# Altium PCB PCB1.PcbDoc
Units mm, origin at the board's own origin, x right, y up, seen from the top; angles counter-clockwise.
Board outline 51 x 58.5 mm, 2 copper layers (Top Layer, Bottom Layer), stack 0.452 mm thick; 7 components, 8 nets, 61 pads, 0 vias.
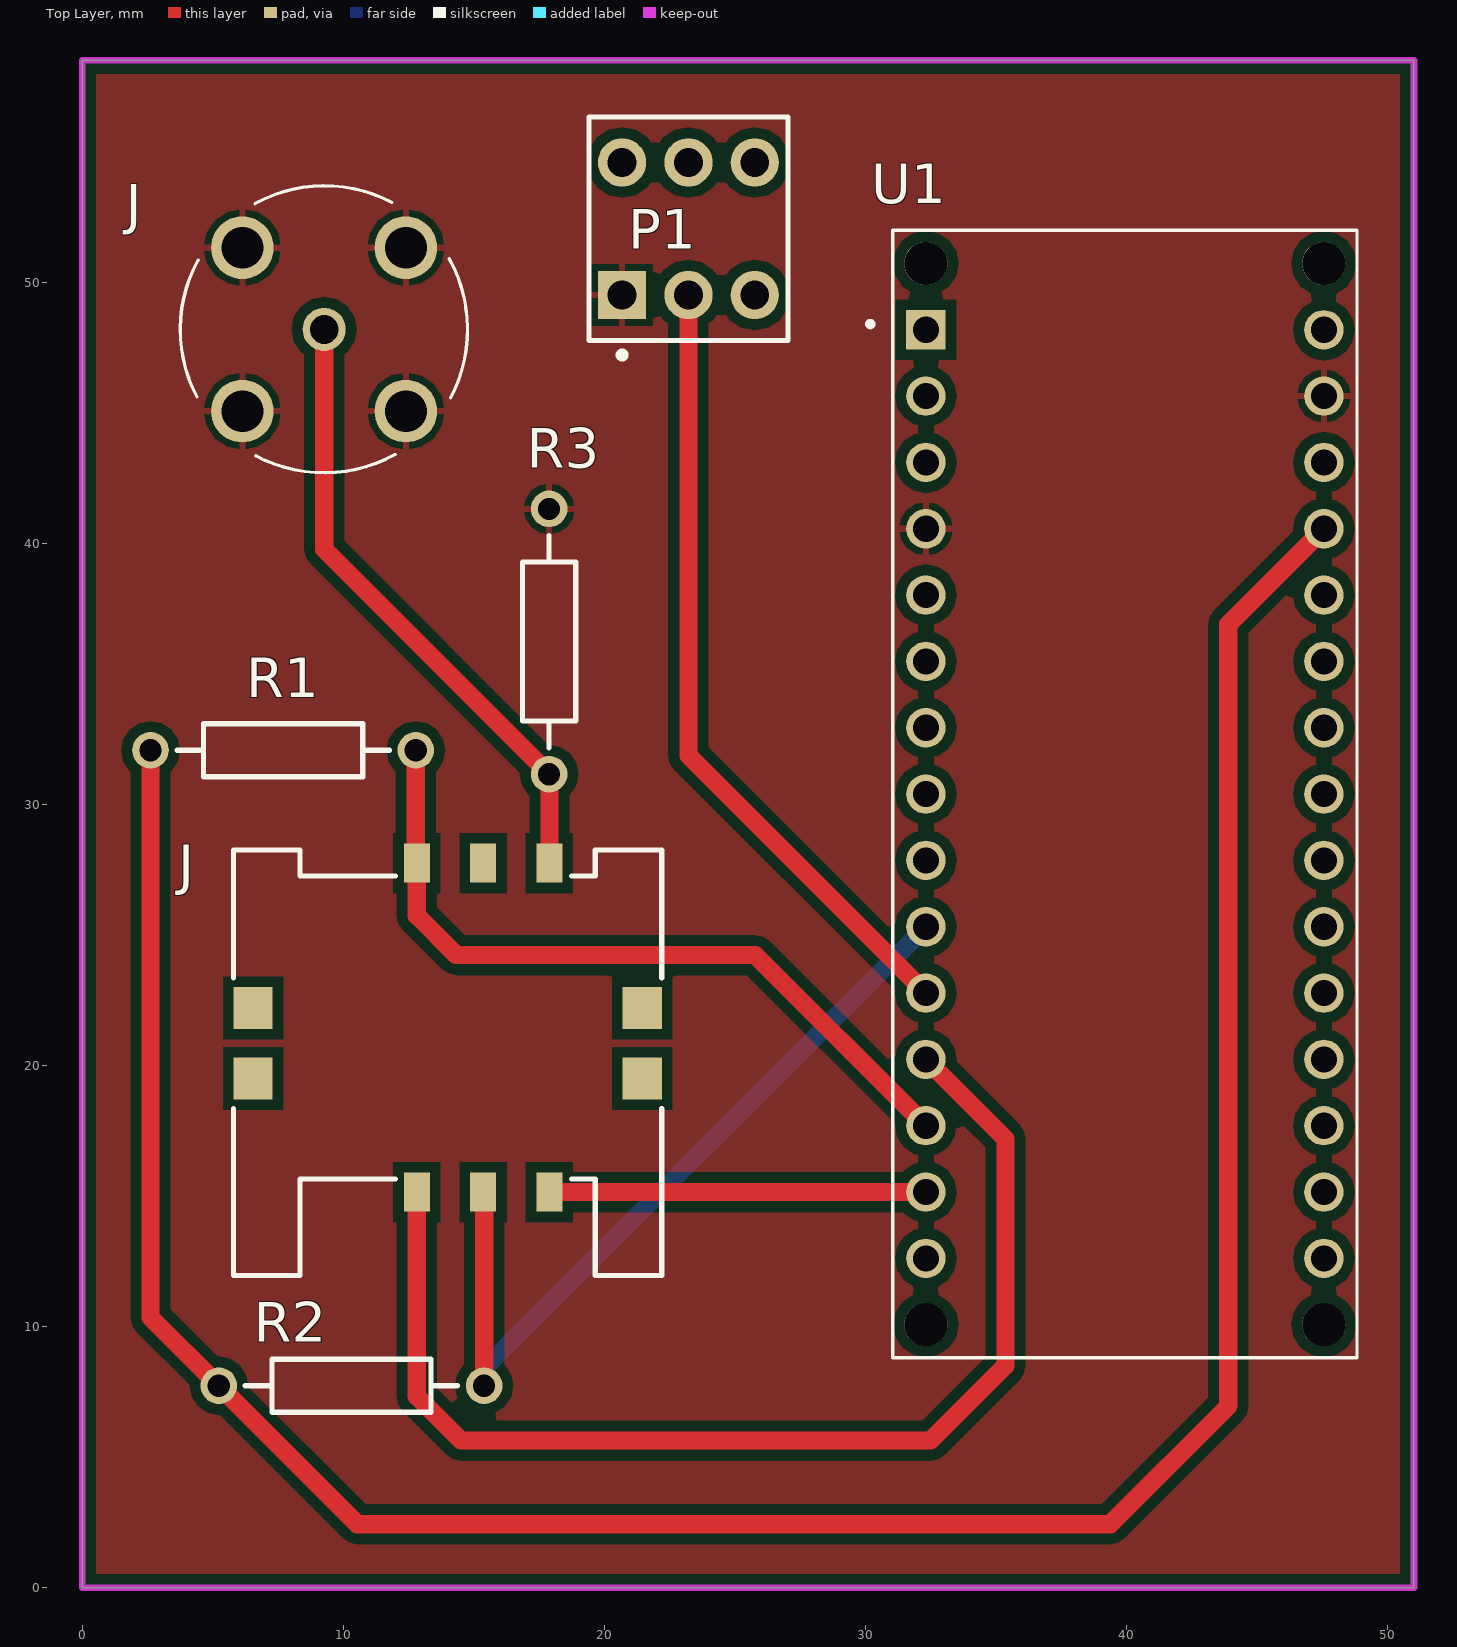
[diagram p0: Top Layer view]
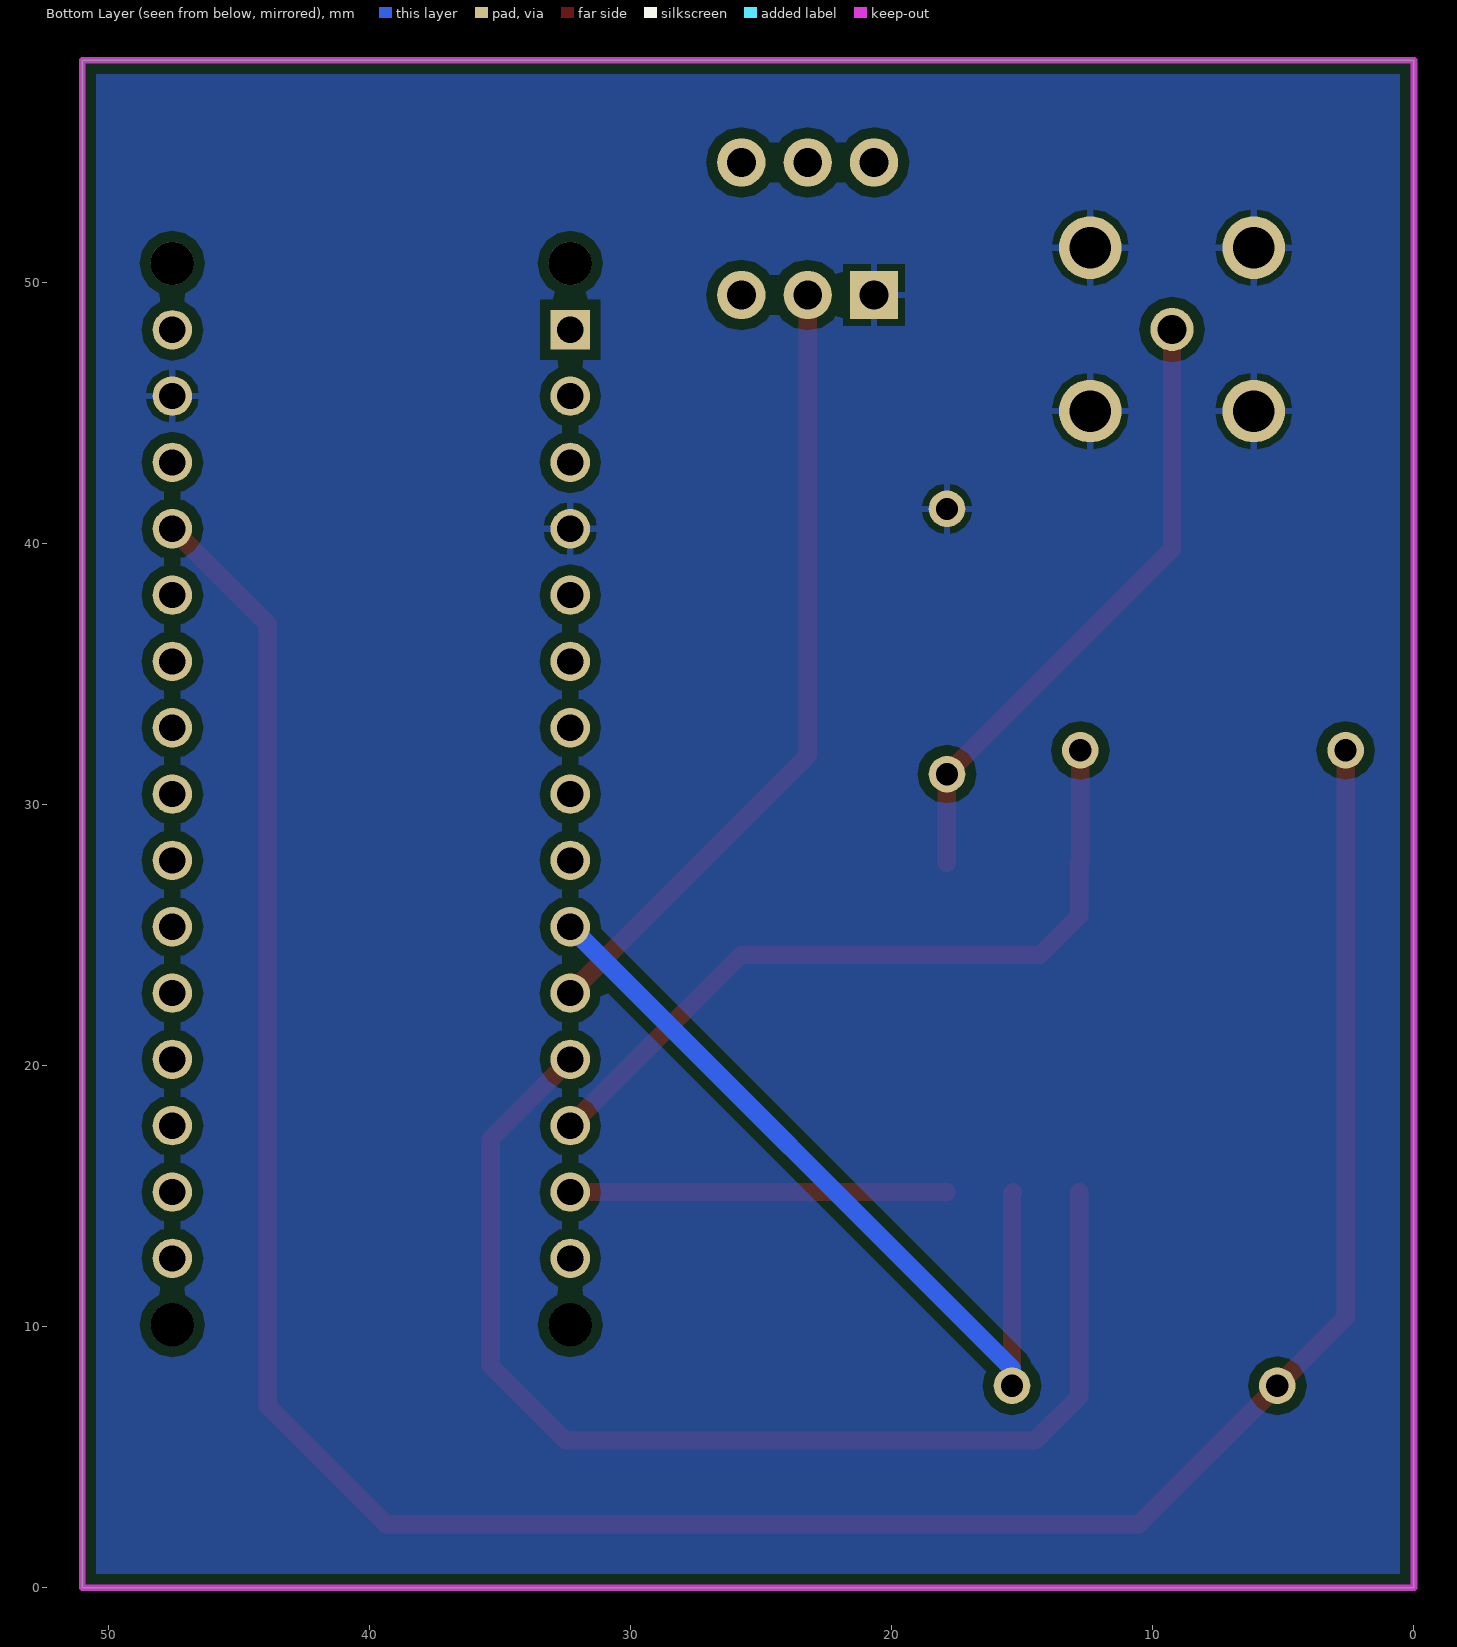
[diagram p1: Bottom Layer view, seen from below]

## Layer stack, top to bottom
Top Solder: solder mask 0.0102, Solder Resist, Dk 3.5
Top Layer: signal copper 0.0356
Dielectric 1: core 0.254, FR-4, Dk 4.2
Dielectric 2: prepreg 0.127, Dk 4.2
Bottom Layer: signal copper 0.0356
Bottom Solder: solder mask 0.0102, Solder Resist, Dk 3.5

## Board outline
0,0 0,58.5 51,58.5 51,0

## Design rules (kind name [scope] priority, off if disabled: settings)
Clearance "PolyGon Pour Clearance" [InPolygon] p1: gap=0.4 ignorepadtopadclearanceinfootprint=FALSE
Clearance [All] p2: gap=0.4 ignorepadtopadclearanceinfootprint=FALSE
PolygonConnect [All] p1: connectstyle=Relief reliefconductorwidth=0.254 reliefentries=4 polygonreliefangle="90 Angle" airgapwidth=0.254
RoutingVias [All] p1: holewidth=0.711 width=1.27 viastyle="Through Hole" minholewidth=0.711 minwidth=1.27 maxholewidth=0.711 maxwidth=1.27
SolderMaskExpansion [All] p1: expansion=0.102
Width [All] p1: maxlimit=0.7 minlimit=0.7 preferedwidth=0.7
30 further rules are at their usual default settings.

## Classes and differential pairs
component class Sheet1: J P1 R1 R2 R3 U1

## Components (designator, comment, footprint, x,y, rotation, side; value= is the part's Value field where it differs from the comment)
J "BNC" TE_5-1634503-1 9.265,48.19 r90 top
J "SimCard" GCT_SIM2055-6-0-XX-00-X_REVI 13.995,21.455 r180 top
P1 "On/Off" DPDT-6 23.216,52.045 r90 top
R1 "Res2" AXIAL-0.4 7.696,32.072 r180 top value=10K
R2 "Res2" AXIAL-0.4 10.312,7.739 r180 top value=10K
R3 "Res2" AXIAL-0.4 17.882,36.238 r270 top value=10
U1 "ArduinoNano" MODULE_A000005 39.929,30.396 r0 top

## Footprints (in the part's own frame and the unit in brackets; to place one, negate y for a bottom-side part, rotate by r counter-clockwise, add the part's x,y. Pads: shape width x height; smd on the part's side, far side on the other; paste and mask are expansions set on the pad)
AXIAL-0.4 [mm] "Axial Device, Thru-Hole; 2 Leads; 0.4 in Pin Spacing"
  round 1.4 hole 0.85: 1(-5.08,0) 2(5.08,0)
  silkscreen extent -4.06,-1.02 4.06,1.02
DPDT-6 [mm] "Switch; 6 Leads"
  rect 1.85x1.85 hole 1.1: 1(-2.54,2.54)
  round 1.85 hole 1.1: 2(-2.54,0) 3(-2.54,-2.54) 4(2.54,-2.54) 5(2.54,0) 6(2.54,2.54)
  silkscreen extent -4.96,-3.81 4.28,3.81
GCT_SIM2055-6-0-XX-00-X_REVI [mm]
  rect 1x1.5 smd: 1(-3.9,6.3) 2(-1.36,6.3) 3(1.18,6.3) 5(-3.9,-6.3) 6(-1.36,-6.3) 7(1.18,-6.3)
  rect 1.5x1.6 smd: 8(-7.45,-0.75) 9(7.45,-0.75) 10(7.45,1.95) 11(-7.45,1.95)
  silkscreen extent -8.2,-6.8 8.2,9.5
MODULE_A000005 [mm]
  rect 1.508x1.508 hole 1: 1(-7.62,17.78)
  round 1.508 hole 1: 2(-7.62,15.24) 3(-7.62,12.7) 4(-7.62,10.16) 5(-7.62,7.62) 6(-7.62,5.08) 7(-7.62,2.54) 8(-7.62,0) 9(-7.62,-2.54) 10(-7.62,-5.08) 11(-7.62,-7.62) 12(-7.62,-10.16) 13(-7.62,-12.7) 14(-7.62,-15.24) 15(-7.62,-17.78) 16(7.62,-17.78) 17(7.62,-15.24) 18(7.62,-12.7) 19(7.62,-10.16) 20(7.62,-7.62) 21(7.62,-5.08) 22(7.62,-2.54) 23(7.62,0) 24(7.62,2.54) 25(7.62,5.08) 26(7.62,7.62) 27(7.62,10.16) 28(7.62,12.7) 29(7.62,15.24) 30(7.62,17.78)
  round 1.651 hole 1.651 unplated: ""(-7.62,-20.32) ""(-7.62,20.32) ""(7.62,-20.32) ""(7.62,20.32)
  silkscreen extent -9.85,-21.59 8.89,21.59
TE_5-1634503-1 [mm]
  round 1.65 hole 1.1: 1(0,0)
  round 2.4 hole 1.6: 2(-3.13,3.13) 3(3.13,3.13) 4(3.13,-3.13) 5(-3.13,-3.13)
  silkscreen extent -5.49,-5.49 5.5,5.51

## Part data
J: library part 5-1634503-1, "Rf / Coaxial Connector, Bnc Coaxial, Straight Jack, Solder, 50 Ohm, Brass", Package=None, Availability=Unavailable, EU_RoHS_Compliance=Compliant, MF="TE Connectivity", MP=5-1634503-1, Number_of_Positions=1, Price=None, SnapEDA_Link=https://www.snapeda.com/parts/5-1634503-1/TE%20Connectivity%20AMP%20Connectors/view-part/441267/?ref=snap, TE_purchase_URL=https://www.te.com/usa-en/product-5-1634503-1.html?te_bu=Cor&te_type=disp&te_campaign=seda_glo_cor-seda-global-disp-prtnr-fy19-seda-model-bom-cta_sma-317_1&elqCampaignId=32493
J: library part SIM2055-6-0-XX-00-X_REVI, "6 Position Card Connector Mini SIM Surface Mount, Right Angle Gold", Package=None, Availability=Unavailable, MF="Global Connector Technology", MP=SIM2055-6-0-22-00-A, Price=None, SnapEDA_Link=https://www.snapeda.com/parts/SIM2055-6-0-22-00-A/Global%20Connector%20Technology/view-part/812982/?ref=snap
P1: library part MHDR2X3, "Header, 3-Pin, Dual row", LatestRevisionDate=17-Jul-2002, LatestRevisionNote="Re-released for DXP Platform.", Publisher="Altium Limited"
R1 R2 R3: "Resistor", LatestRevisionDate=17-Jul-2002, LatestRevisionNote="Re-released for DXP Platform.", PackageDescription="Axial Device, Thru-Hole; 2 Leads; 0.4 in Pin Spacing", PackageReference=AXIAL-0.4, Published=8-Jun-2000, Publisher="Altium Limited"
U1: library part A000005, "CLOCK SAW OSCILLATOR SEAM7050 T&", Package=None, Digi-Key_Part_Number=SPA000005J-ND, Digi-Key_Purchase_URL=https://www.digikey.com/product-detail/en/diodes-incorporated/SPA000005J/SPA000005J-ND/9769570?utm_source=snapeda&utm_medium=aggregator&utm_campaign=symbol, MF=Arduino, MP=A000005, SnapEDA_Link=https://www.snapeda.com/parts/A000005/Arduino/view-part/51027/?ref=snap

## Nets (pads, with @x,y where several pads share a name; then routed paths per layer and width w, separated by ;. In a path a pad name is that pad's centre, name@x,y a point inside that pad or via, vN(x,y) a via of type N, cw(c..) or ccw(c..) an arc to the next point about the centre after c; other vN are vias at no path point)
CLK: J.3@12.815,15.155 U1.12 | length 45.2
  Top Layer w0.7: J.3@12.815,15.155 12.815,7.327 14.503,5.639 32.487,5.639 35.357,8.509 35.357,17.188 U1.12
GND: J.2@6.135,45.06 J.3@6.135,51.32 J.4 J.5@12.395,45.06 P1.1 R3.1 U1.4 U1.29
I/O: J.7 R1.1 U1.13 | length 29.2
  Top Layer w0.7: R1.1 12.776,27.794 J.7 12.815,25.742 14.326,24.232 25.773,24.232 U1.13
Inserted_A: P1.2 U1.11 | length 30.5
  Top Layer w0.7: P1.2 23.216,31.869 U1.11
RST: J.2@15.355,15.155 R2.1 U1.10 | length 32
  Top Layer w0.7: J.2@15.355,15.155 15.392,15.118 R2.1
  Bottom Layer w0.7: R2.1 15.392,8.399 U1.10
SC_R: J.1@9.265,48.19 J.5@17.895,27.755 R3.2 | length 24
  Top Layer w0.7: J.1@9.265,48.19 9.265,39.774 R3.2 17.895,31.144 J.5@17.895,27.755
SCVCC: J.1@17.895,15.155 U1.14 | length 14.4
  Top Layer w0.7: J.1@17.895,15.155 U1.14
VCC: R1.2 R2.2 U1.27 | length 103.3
  Top Layer w0.7: R1.2 2.616,10.355 R2.2 10.533,2.438 39.37,2.438 43.891,6.96 43.891,36.898 U1.27
pads on no net: J.6 J.8 J.9 J.10 J.11 P1.3 P1.4 P1.5 P1.6 U1. U1.1 U1.2 U1.3 U1.5 U1.6 U1.7 U1.8 U1.9 U1.15 U1.16 U1.17 U1.18 U1.19 U1.20 U1.21 U1.22 U1.23 U1.24 U1.25 U1.26 U1.28 U1.30

## Polygon pours and split planes (outlines as drawn)
GND on Bottom Layer "Layer2-GND" (solid, pour order 62): 0,0 0,58.5 51,58.5 51,0
GND on Top Layer "Layer1-GND" (solid, pour order 64): 0,0 0,58.5 51,58.5 51,0

## Keep-outs
Keep-Out Layer:
  the board outline again, w0.254